# Altium PCB Driver.PcbDoc
Units mm, origin at the board's own origin, x right, y up, seen from the top; angles counter-clockwise.
Board outline 45.72 x 26.92 mm, 2 copper layers (Top Layer, Bottom Layer); 27 components, 20 nets, 93 pads, 3 vias.
Unrouted connection lines stored in the file: 61.
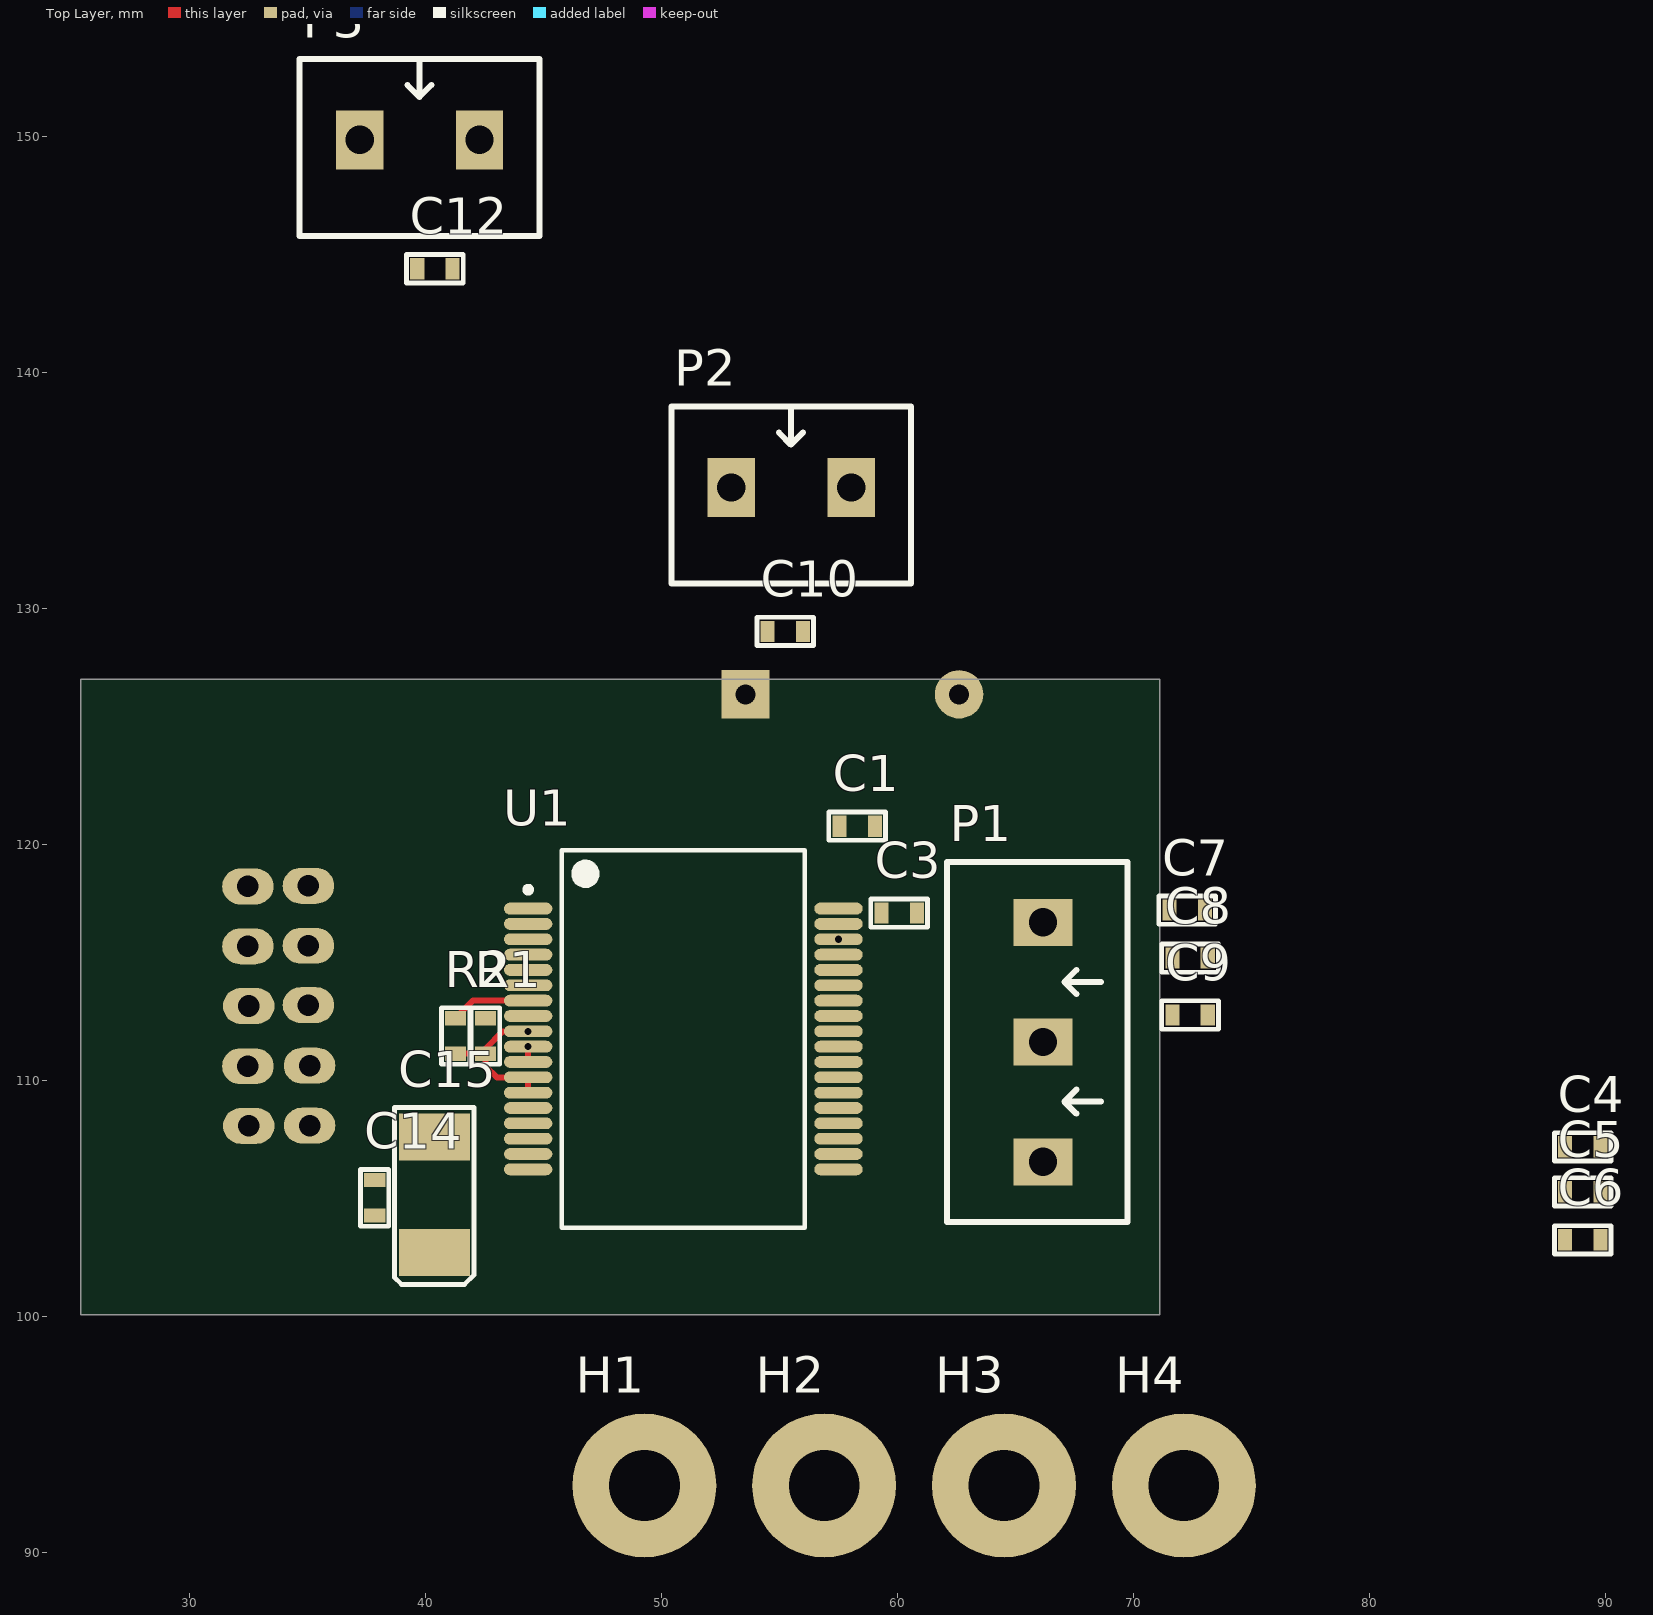
[diagram p0: Top Layer view]
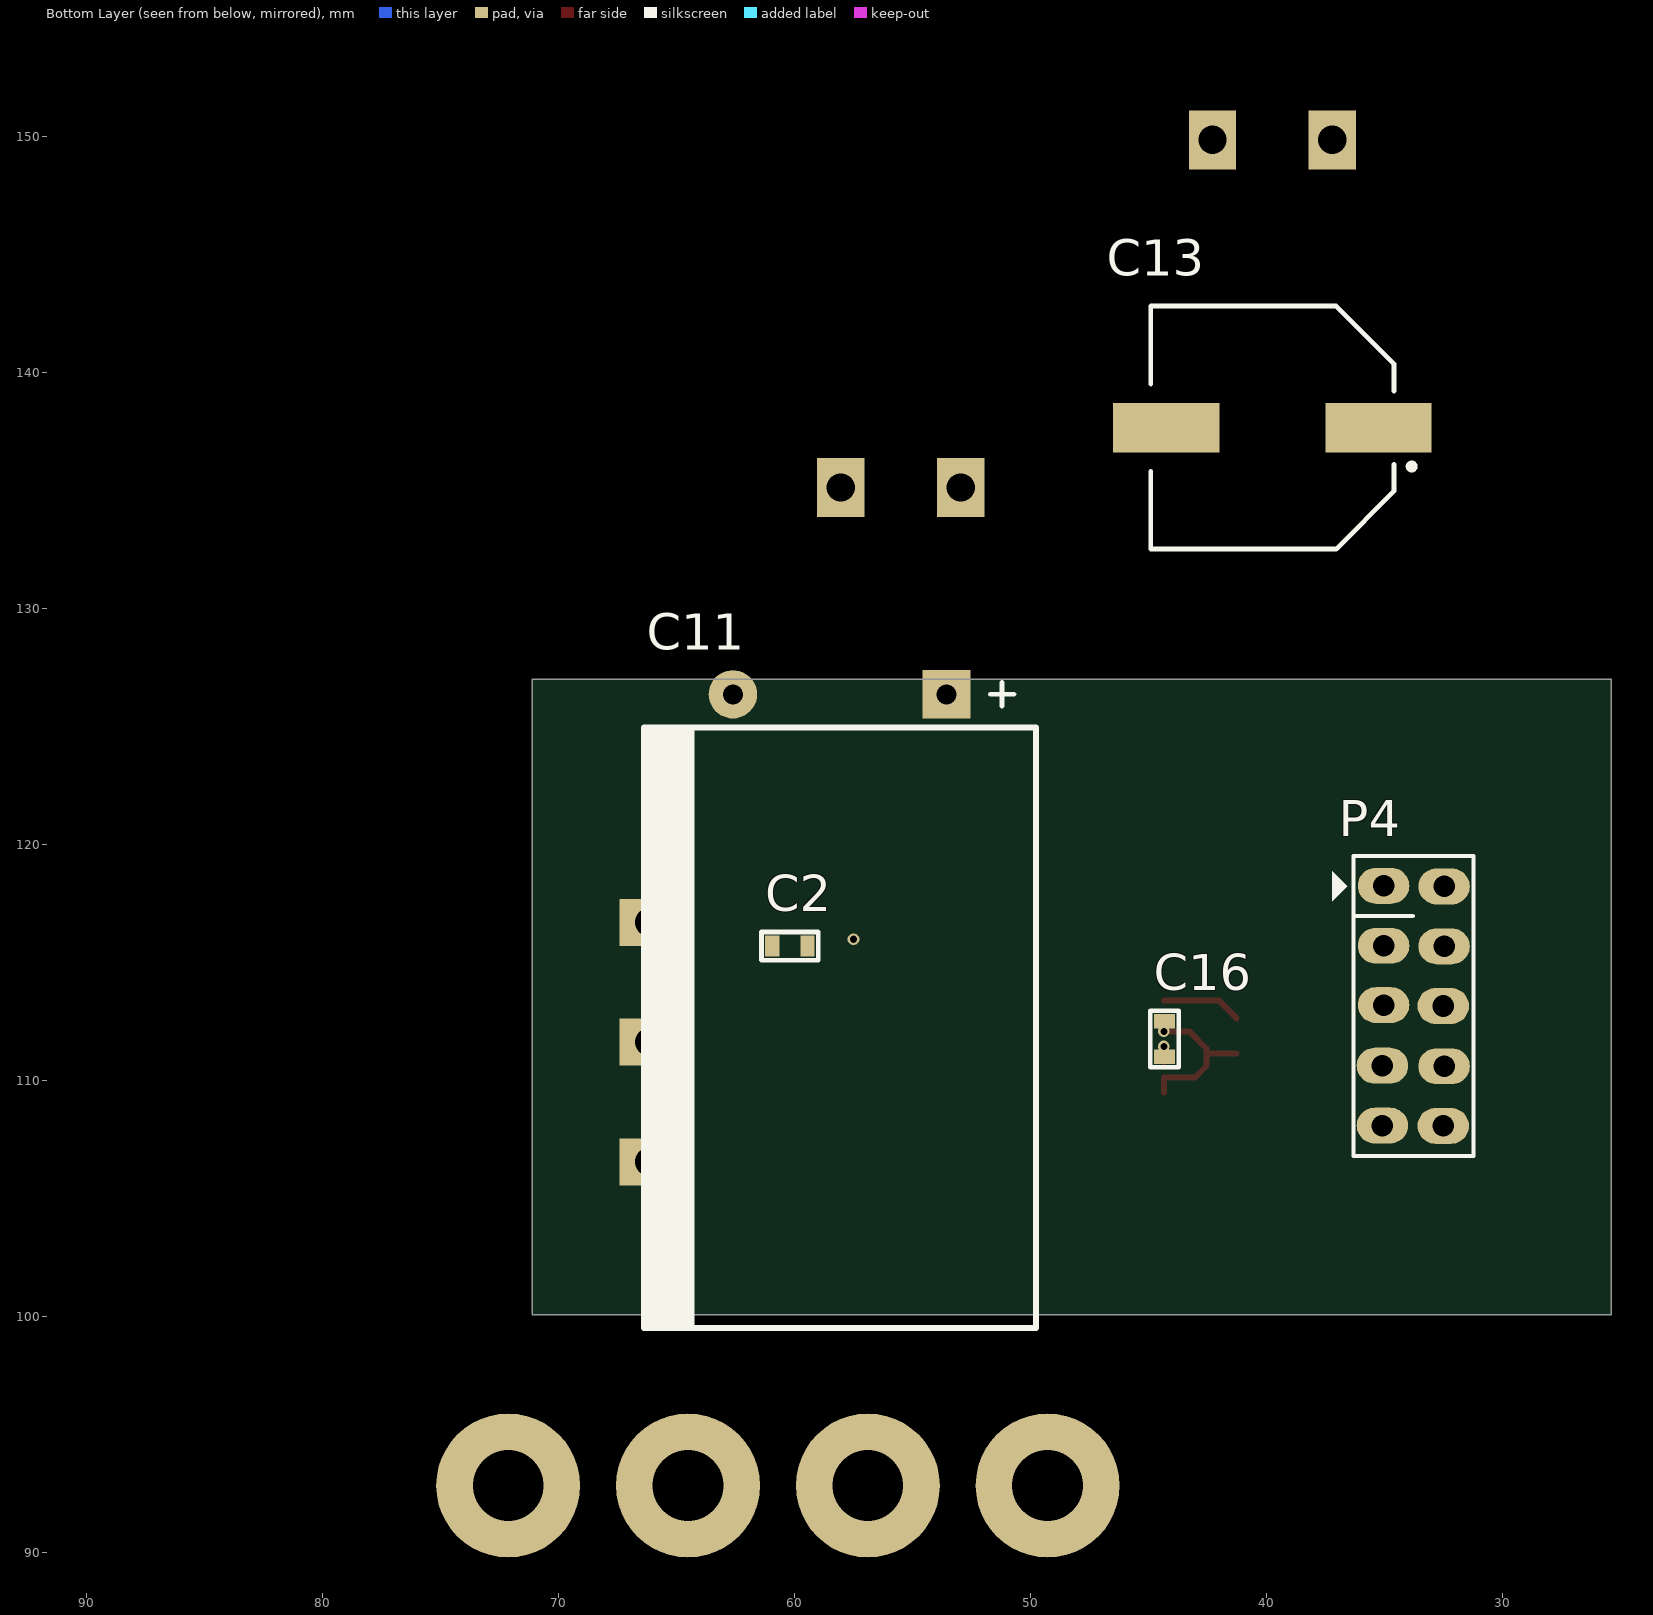
[diagram p1: Bottom Layer view, seen from below]

## Layer stack, top to bottom
Top Solder: solder mask 0.0102, Solder Resist, Dk 3.5
Top Layer: signal copper 0.0356
Dielectric 1: dielectric 0.32, FR-4, Dk 4.8
Bottom Layer: signal copper 0.0356
Bottom Solder: solder mask 0.0102, Solder Resist, Dk 3.5

## Board outline
25.4,100.076 71.12,100.076 71.12,127 25.4,127

## Design rules (kind name [scope] priority, off if disabled: settings)
Clearance Clearance_DRV8332 [InComponent('U1')] p1: gap=0.254 ignorepadtopadclearanceinfootprint=FALSE except(0: Arc-Hole Track-Hole SMDPad-SMDPad SMDPad-Hole THPad-Hole Via-Hole Fill-Hole Poly-Hole Region-Hole Text-Hole; 0.1: SMDPad-Via)
Clearance [All] p2: gap=0.254 ignorepadtopadclearanceinfootprint=FALSE except(0: Arc-Hole Track-Hole SMDPad-Hole THPad-Hole Via-Hole Fill-Hole Poly-Hole Region-Hole Text-Hole)
ComponentClearance ComponentClearance_1000uF_Cap [InComponent('C11')] p1: gap=0 collisioncheckmode=3 verticalgap=0 showdistances=FALSE
ComponentClearance [All] p2: gap=0.254 collisioncheckmode=3 verticalgap=0.254 showdistances=FALSE
PolygonConnect [All] p1: connectstyle=Relief reliefconductorwidth=0.254 reliefentries=4 polygonreliefangle="90 Angle" airgapwidth=0.254
RoutingVias [All] p1: holewidth=0.711 width=1.27 viastyle="Through Hole" minholewidth=0.711 minwidth=1.27 maxholewidth=0.711 maxwidth=1.27
SolderMaskExpansion [All] p1: expansion=0.102
Width [All] p1: maxlimit=1.27 minlimit=0.254 preferedwidth=0.254
29 further rules are at their usual default settings.

## Components (designator, comment, footprint, x,y, rotation, side; value= is the part's Value field where it differs from the comment)
C1 "Cap" C_0603 58.293,120.777 r0 top value=1uF
C2 "Cap" C_0603 60.198,115.697 r0 bottom value=100nF
C3 "Cap" C_0603 60.071,117.094 r0 top value=100nF
C4 "Cap" C_0603 89.039,107.188 r0 top value=1uF
C5 "Cap" C_0603 89.039,105.283 r0 top value=100nF
C6 "Cap" C_0603 89.039,103.251 r0 top value=100nF
C7 "Cap" C_0603 72.275,117.221 r0 top value=1uF
C8 "Cap" C_0603 72.402,115.189 r0 top value=100nF
C9 "Cap" C_0603 72.402,112.776 r0 top value=100nF
C10 "Cap" C_0603 55.245,129.032 r180 top value=100nF
C11 "Cap Pol1" "CP2/6 lying" 53.561,126.365 r0 bottom value=1000uF/50V
C12 "Cap" C_0603 40.398,144.399 r0 top value=100nF
C13 "Cap Pol1" "CAP ALU SIZE G" 39.751,137.668 r0 bottom value=470uF/35V
C14 "Cap" C_0603 37.846,105.029 r90 top value=1uF
C15 "Cap Pol1" C_TANTALUM_C 40.386,105.156 r90 top value=47uF/16V
C16 "Cap" C_0603 44.323,111.76 r270 bottom value=100nF
H1 "3mm hole" "3mm HOLE" 49.276,92.837 r0 top
H2 "3mm hole" "3mm HOLE" 56.896,92.837 r0 top
H3 "3mm hole" "3mm HOLE" 64.516,92.837 r0 top
H4 "3mm hole" "3mm HOLE" 72.136,92.837 r0 top
P1 "MOTOR" "DOMINO 3-5mm" 66.167,106.553 r90 top
P2 "Motor power" "DOMINO 2- 5mm" 55.499,135.128 r0 top
P3 "12V power supply" "DOMINO 2- 5mm" 39.751,149.86 r0 top
P4 "Header 5X2" JP5X2 35.052,118.237 r270 bottom
R1 "Res1" R_0603 42.545,111.887 r270 top value=1
R2 "Res1" R_0603 41.275,111.887 r90 top value=22K
U1 "DRV8332" HSSOP36_HEATSINK 50.927,111.76 r0 top

## Footprints (in the part's own frame and the unit in brackets; to place one, negate y for a bottom-side part, rotate by r counter-clockwise, add the part's x,y. Pads: shape width x height; smd on the part's side, far side on the other; paste and mask are expansions set on the pad)
"3mm HOLE" [mm]
  round 6.1 hole 3: 0(0,0)
C_0603 [mm]
  rect 0.6x0.9 smd: 1(-0.75,0) 2(0.75,0)
  silkscreen extent -1.2,-0.6 1.2,0.6, body extent -0.8,-0.4 0.8,0.4, height 0.3
C_TANTALUM_C [mm]
  rect 2x3 smd: 1(-2.45,0) 2(2.45,0)
  silkscreen extent -3.8,-1.67 3.7,1.7, body extent -3,-1.6 3,1.6, height 2.5
"CAP ALU SIZE G" [mm] "Capacitor, Aluminium Electrolytric, 10.3mm L X 10.3mm W X 10.2mm H, IPC Medium Density"
  rect 4.5x2.1 smd: 1(-4.5,0) 2(4.5,0)
  silkscreen extent -6.02,-5.15 5.15,5.15, body extent -6,-5.25 6,5.25, height 10.2
"CP2/6 lying" [mm] "electrolytic capacitor 1000uF/50V"
  rect 2.05x2.05 hole 0.85: 1(0,0)
  round 2.05 hole 0.85: 2(9.05,0)
  silkscreen extent -3.79,-0.51 12.83,26.86
"DOMINO 2- 5mm" [mm]
  rect 2x2.5 hole 1.2: 1(-2.54,0) 2(2.54,0)
  silkscreen extent -5.08,-4.08 5.08,3.43, body extent -5,-4.07 5,3.43, height 10
"DOMINO 3-5mm" [mm]
  rect 2x2.5 hole 1.2: 1(0,0) 2(5.08,0) 3(10.147,0)
  silkscreen extent -2.54,-3.58 12.7,4.06, body extent -2.42,-3.51 12.58,3.99, height 10
HSSOP36_HEATSINK [mm] "HSSOP, 36-Leads, Body 15.90x11.00mm, Pitch 0.65mm, IPC Medium Density"
  oval 2.05x0.5 smd: 1(-6.575,5.525) 2(-6.575,4.875) 3(-6.575,4.225) 4(-6.575,3.575) 5(-6.575,2.925) 6(-6.575,2.275) 7(-6.575,1.625) 8(-6.575,0.975) 9(-6.575,0.325) 10(-6.575,-0.325) 11(-6.575,-0.975) 12(-6.575,-1.625) 13(-6.575,-2.275) 14(-6.575,-2.925) 15(-6.575,-3.575) 16(-6.575,-4.225) 17(-6.575,-4.875) 18(-6.575,-5.525) 19(6.575,-5.525) 20(6.575,-4.875) 21(6.575,-4.225) 22(6.575,-3.575) 23(6.575,-2.925) 24(6.575,-2.275) 25(6.575,-1.625) 26(6.575,-0.975) 27(6.575,-0.325) 28(6.575,0.325) 29(6.575,0.975) 30(6.575,1.625) 31(6.575,2.275) 32(6.575,2.925) 33(6.575,3.575) 34(6.575,4.225) 35(6.575,4.875) 36(6.575,5.525)
  silkscreen extent -6.7,-8 5.15,8, body extent -7.08,-7.95 7.12,7.95, height 3.59
JP5X2 [mil]
  oval 60x86 hole 36: 1(-0.5,0.5) 2(99.5,0.5) 3(198.5,0.5) 4(299.5,-1.5) 5(399.5,-1.5) 6(0.5,101.5) 7(100.5,101.5) 8(200,100) 9(300.5,101.5) 10(400,100)
  silkscreen extent -51,-85 450,150, body extent -50,-50 450,150, height 335
R_0603 [mm]
  rect 0.6x0.9 smd: 1(-0.75,0) 2(0.75,0)
  silkscreen extent -1.2,-0.6 1.2,0.6, body extent -0.8,-0.42 0.8,0.4, height 0.45

## Part data
C1 C2 C3 C4 C5 C6 C7 C8 C9 C10 C12 C14 C16: "Capacitor", LatestRevisionDate=17-Jul-2002, LatestRevisionNote="Re-released for DXP Platform.", PackageDescription="Radial Cap, Thru-Hole; 2 Leads; 0.3 in Pin Spacing", PackageReference=RAD-0.3, Published=8-Jun-2000, Publisher="Altium Limited"
C11 C13 C15: "Polarized Capacitor (Radial)", LatestRevisionDate=17-Jul-2002, LatestRevisionNote="Re-released for DXP Platform.", PackageDescription="Polarized Capacitor (Radial); 2 Leads", PackageReference=RB7.6-15, Published=8-Jun-2000, Publisher="Altium Limited"
P1: library part "Header 3", "Header, 3-Pin", LatestRevisionDate=17-Jul-2002, LatestRevisionNote="Re-released for DXP Platform.", Publisher="Altium Limited"
P2 P3: library part "Domino 2", "Domino, 2-Pin", LatestRevisionDate=17-Jul-2002, LatestRevisionNote="Re-released for DXP Platform.", Publisher="Altium Limited"
P4: "Header, 5-Pin, Dual row", LatestRevisionDate=17-Jul-2002, LatestRevisionNote="Re-released for DXP Platform.", Publisher="Altium Limited"
R1 R2: "Resistor", LatestRevisionDate=17-Jul-2002, LatestRevisionNote="Re-released for DXP Platform.", PackageDescription="Axial Device, Thru-Hole; 2 Leads; 0.3 in Pin Spacing", PackageReference=AXIAL-0.3, Published=8-Jun-2000, Publisher="Altium Limited"
U1: "Three-Phase PWM Motor Driver"

## Via types
v1: diameter 0.5, hole 0.3, Top Layer to Bottom Layer, 3 vias

## Nets (pads, with @x,y where several pads share a name; then routed paths per layer and width w, separated by ;. In a path a pad name is that pad's centre, name@x,y a point inside that pad or via, vN(x,y) a via of type N, cw(c..) or ccw(c..) an arc to the next point about the centre after c; other vN are vias at no path point)
AGND: C16.1 R1.2 R2.1 U1.9 U1.12 U1.13 | length 6.8
  Top Layer w0.254: R2.1 R1.2 ; U1.13 U1.12 43.027,110.135 42.545,110.617 R1.2 ; v1(44.352,112.085) 43.282,112.085 42.545,111.348 R1.2
FAULT: P4.2 U1.3
GND: C1.2 C2.2 C4.2 C5.2 C7.2 C8.2 C10.1 C11.2 C12.1 C13.2 C14.1 C15.2 P2.1 P3.1 P4.4 P4.5 R1.1 U1.8 U1.23 U1.24 U1.25 U1.26 U1.27 U1.31 U1.32
GVDD: C1.1 C4.1 C7.1 C12.2 C13.1 C14.2 C15.1 P3.2 U1.1 U1.17 U1.18 U1.19 U1.36
NetC3_1: C3.1 U1.35
NetC6_1: C6.1 U1.28
NetC9_1: C9.1 U1.20
NetC16_2: C16.2 U1.10 U1.11 | length 0.6
  Top Layer w0.254: U1.11 v1(44.352,111.435)
NetR2_2: R2.2 U1.7 | length 3.4
  Top Layer w0.254: R2.2 41.275,112.656 42.004,113.385 U1.7
OTW: P4.1 U1.2
OUT_A: C3.2 P1.3 U1.33
OUT_B: C6.2 P1.2 U1.30
OUT_C: C9.2 P1.1 U1.22
PVDD: C2.1 C5.1 C8.1 C10.2 C11.1 P2.2 U1.21 U1.29 U1.34
  other v1: 57.502,115.985
PWM_A: P4.6 U1.4
PWM_B: P4.7 U1.6
PWM_C: P4.8 U1.16
RESET_A: P4.9 U1.5
RESET_B: P4.10 U1.14
RESET_C: P4.3 U1.15
pads on no net: H1.0 H2.0 H3.0 H4.0